# Altium PCB PCB1_DEC22.pcbdoc (part 2 of 2)
Units mil, origin at the board's own origin, x right, y up, seen from the top; angles counter-clockwise.
Board outline 3265 x 2215 mil, 2 copper layers (Top Layer, Bottom Layer); 80 components, 60 nets, 287 pads, 93 vias.
Unrouted connection lines stored in the file: 5.
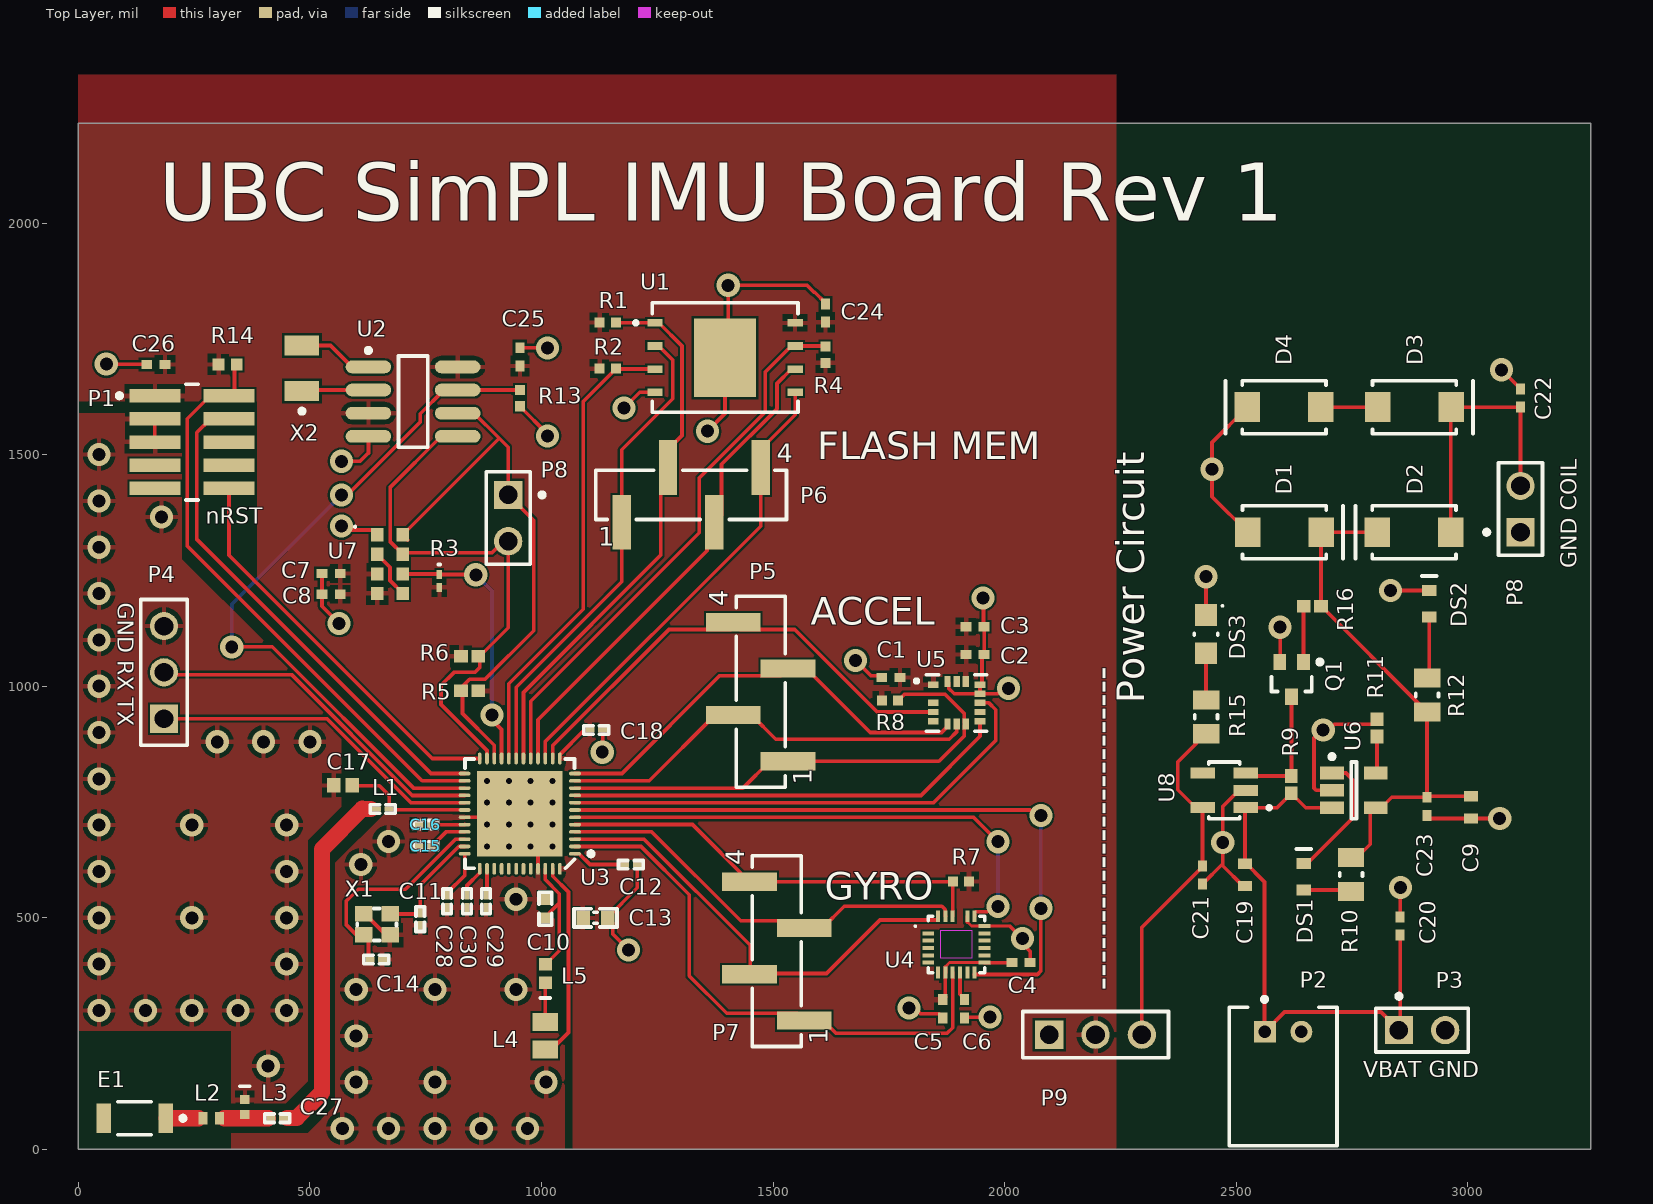
[diagram p0: Top Layer view]

## Via types
v1: diameter 50, hole 28, Top Layer to Bottom Layer, 77 vias
v2: diameter 25.98, hole 12.99, Top Layer to Bottom Layer, 16 vias

## Nets (pads, with @x,y where several pads share a name; then routed paths per layer and width w, separated by ;. In a path a pad name is that pad's centre, name@x,y a point inside that pad or via, vN(x,y) a via of type N, cw(c..) or ccw(c..) an arc to the next point about the centre after c; other vN are vias at no path point) (continued)
MEM_SPI_HOLD: (continued)
  Top Layer w8: U3.17 976.84,967.55 1340.77,1331.48 1340.77,1449.5 1483.22,1591.95 1483.22,1678.25 1539.49,1734.52 U1.7 R4.1@1613.22,1734.52
MEM_SPI_W: R2.1 U1.3 U3.20 | length 1030.2
  Top Layer w8: U3.20 929.6,1005.49 1090.02,1165.92 1090.02,1614.63 1160.93,1685.54 1161.45,1685.03 1236.73,1685.03 1244.49,1685.03 U1.3 U1.3@1236.73,1684.52
NetC6_1: C6.1 U4.10 | length 62.8
  Top Layer w8: 1903.59,335.13 U4.10@1903.59,381.78 ; 1903.69,335.13 1913.69,325.13 C6.1
NetC17_2: C17.2 L1.1 U3.30 | length 283.2
  Top Layer w8: C17.2@591.31,785 650.04,785 671.08,763.96 L1.1@671.08,734.85 ; L1.1@671.18,733.09 L1.1@672.94,733.09 ; L1.1 L1.1@672.94,733.09 ; U3.30@833.76,733.09 L1.1@672.94,733.09 ; U3.30@833.86,733.09 U3.30@834.22,732.73
NetC27_1: C27.1 L2.1 L3.2 | length 94.8
  Top Layer w8: L2.1 L2.1@305.06,67.24
  Top Layer w35: 315,67.24 C27.1@409.57,67.24
NetC29_2: C29.2 U3.38 | length 57.3
  Top Layer w8: C29.2 880.31,553.26 882.45,555.39 U3.38
NetC30_2: C30.2 U3.37 | length 67.8
  Top Layer w8: C30.2 839.22,569.64 U3.37@866.6,597.03 ; U3.37@866.7,597.03 U3.37@866.7,605.76
NetD3_1: D3.1 D4.1 | length 122.7
  Top Layer w8: D4.1 D3.1
NetDS1_1: DS1.1 R10.1 | length 103.2
  Top Layer w8: DS1.1 2744.94,559.88 R10.1
NetDS1_2: DS1.2 U6.1 | length 289.3
  Top Layer w8: DS1.2@2649.47,613.3 2751.32,715.15 2751.32,797.93 2736.82,812.43 2706.85,812.43 U6.1 U6.1@2718.54,812.54
NetDS2_1: DS2.1 R12.1 | length 134.3
  Top Layer w8: R12.1@2917.01,1017.44 DS2.1 DS2.1@2918.82,1151.04
NetDS3_2: DS3.2 R15.1 | length 100.8
  Top Layer w8: R15.1 DS3.2
NetE1_1: E1.1 L2.2 | length 69.1
  Top Layer w35: E1.1@190.42,67.09 259.57,67.09
NetL4_1: L4.1 U3.47 | length 426.9
  Top Layer w8: L4.1@1016.21,210.41 1058.22,252.41 1058.22,555.54 ; U3.47@1024.18,605.76 1024.18,589.68 1058.31,555.54
NetL4_2: L4.2 L5.1 | length 90.1
  Top Layer w8: L4.2@1008.34,269.85 L5.1
NetQ1_1: Q1.1 R16.1 | length 120.4
  Top Layer w8: Q1.1 2645.1,1171.72 R16.1
NetQ1_3: Q1.3 R9.1 U8.3 | length 272.6
  Top Layer w8: U8.3 2527.05,806.13 R9.1 2619.51,806.66 Q1.3
NetR11_2: R11.2 U6.5 | length 80
  Top Layer w8: U6.5 2803.97,815.3 R11.2
NetU2_1: U2.1 X2.2 | length 162.7
  Top Layer w8: X2.2 544.69,1735.58 590.84,1689.44 U2.1
NetU2_2: U2.2 X2.1 | length 144.5
  Top Layer w8: X2.1@482.82,1637.16 X2.1@485.1,1639.44 ; X2.1@485.01,1639.44 U2.2
nRESET: P1.10 U3.24 | length 867.4
  Top Layer w8: P1.10 325.48,1282.59 764.12,843.95 U3.24
P0.27: U3.39
P0.28/AIN4: U3.40
RF: C27.2 L1.2 | length 764.5
  Top Layer w35: C27.2@451,68 471.46,68 526.23,122.77 526.23,648.2 613.23,735.2 631.31,735
RST_CLK: R13.2 U2.7 U3.27 | length 1544
  Top Layer w8: v1(331.31,1085) 418.64,1085 723.67,779.97 U3.27 ; v1(568.22,1413.04) 580.72,1413.04 738.22,1570.54 738.22,1588.07 U2.7@789.58,1639.44 ; U2.7@789.68,1639.44 U2.7 R13.2@952.29,1639.44 ; R13.2@952.39,1639.44 R13.2@952.82,1639.87
  Bottom Layer w8: v1(331.31,1085) 331.31,1176.14 v1(568.22,1413.04)
RX: P4.2 U3.28 | length 757.1
  Top Layer w8: P4.2@185,1025 460.25,1025 721.03,764.22 U3.28
SWDCLK: P1.4 U3.25 | length 1100.5
  Top Layer w8: 255.48,1547.5 255.48,1317.59 761.6,811.47 U3.25 ; 255.58,1547.5 P1.4@285.22,1577.15 ; P1.4@285.13,1577.15 P1.4@285.22,1577.15 ; P1.4 P1.4@285.22,1577.15
SWDIO: P1.2 R14.1 U3.26 | length 1261.4
  Top Layer w8: P1.2@337.05,1638.72 P1.2 285.13,1627.15 235.48,1577.5 235.48,1302.59 742.35,795.72 U3.26 ; P1.2@337.15,1638.72 R14.1@337.15,1689.7
TX: P4.1 U3.29 | length 735.7
  Top Layer w8: P4.1@173.58,929.85 P4.1 537.02,929.85 718.39,748.48 U3.29
VBAT: C19.2 C20.1 P2.1 P3.1 R9.2 U6.3 U8.1 | length 1243.5
  Top Layer w8: R9.2 R9.2@2618.97,767.74 ; U6.3 2649.96,737.74 2630.74,756.96 2629.75,756.96 R9.2@2618.97,767.74 ; C20.1 2853.97,260.3 P3.1 2812.34,296.43 2604.27,296.43 P2.1 2561.22,254.63 2561.22,577.54 2518.97,619.79 2518.97,736.09 U8.1 2587.99,737.74 2607.21,756.96 2608.19,756.96 R9.2@2618.97,767.74
VBUS: C9.2 C23.1 D1.2 D2.2 R10.2 R12.2 R16.2 U6.4 | length 1150
  Top Layer w8: R10.2@2749.23,618.84 2789.41,659.02 2789.41,737.74 U6.4 2813.03,737.74 2835.59,760.3 C23.1 R12.2 ; D2.2 D1.2 2683.21,1332.33 R16.2 2684.19,1172.43 2894.84,961.78 R12.2 ; R12.2@2912.55,944.06 R12.2 ; C23.1@2914.13,762.43 C9.2
XC1: C14.2 U3.34 X1.1 | length 467.4
  Top Layer w8: C14.2@626.53,412.76 626.53,452.56 X1.1 600.8,462.96 578.22,485.54 578.22,535.54 604.22,561.54 706.22,561.54 814.41,669.74 ; C14.2@626.63,412.76 C14.2 ; 814.51,669.74 U3.34@834.22,669.74
XC2: C11.2 U3.35 X1.3 | length 256.3
  Top Layer w8: X1.3 C11.2@735.66,508.24 ; C11.2@735.75,508.24 C11.2 ; C11.2@738.22,510.8 738.22,570.6 U3.35@821.6,653.99 ; U3.35@821.7,653.99 U3.35@834.22,653.99
pads on no net: E1.2 P1.6 P1.7 P1.8 P1.9 U3.41 U3.42 U3.43 U3.44 U4.1 U4.2 U4.3 U4.4 U4.5 U4.6 U4.7 U4.11 U4.14 U4.15 U4.16 U4.17 U4.21 U5.2 U5.3 U5.5 U5.10 U5.15 U8.4
copper on no net:
  other v2: 882.35,653.99 929.6,653.99 976.84,653.99 1024.08,653.99 882.35,701.23 929.6,701.23 976.84,701.23 1024.08,701.23 882.35,748.48 929.6,748.48 976.84,748.48 1024.08,748.48 882.35,795.72 929.6,795.72 976.84,795.72 1024.08,795.72

## Polygon pours and split planes (outlines as drawn)
GND on Top Layer "Top Layer-GND 1" (solid, pour order 24): 0,255.91 330,255.91 330,100 447.73,100 495,147.27 495,666.98 568,739.98 568,929.91 223.86,1274.05 223.86,1589.44 0,1589.44
+3V3 on Top Layer "Top Layer-+3V3" (solid, remove dead copper, pour order 18): 1067.22,0 2241.22,0 2241.22,2320 0,2320 0,1615 386.31,1615 386.31,1222.45 1067.22,541.54
GND on Top Layer "Top Layer-GND" (solid, remove dead copper, pour order 26): 330,35 330,0 1050,0 1050,670 986.91,733.09 669.22,733.09 555,618.87 555,95 495,35
GND on Bottom Layer "Bottom Layer-GND" (solid, remove dead copper, pour order 22): 0,0 3315,0 3315,2360 0,2360

## Silkscreen, mask and mechanical layers (free items; w line width, h text height)
Top Overlay:
  text "UBC SimPL IMU Board Rev 1" at 175,2005 h125
  text "FLASH MEM" at 1595,1490 h60
  text "nRST" at 275.48,1350.54 h35
  text "GND COIL" at 3235,1255 h35 r90
  text "GND RX TX" at 85,1180 h35 r270
  text "ACCEL" at 1581.22,1132.54 h60
  text "Power Circuit" at 2301.22,963.54 h60 r90
  text "GYRO" at 1611.22,539.22 h60
  text "------------------------" at 2237.22,342.54 h60 r90
  text "VBAT GND" at 2773.82,155.43 h35

## Text inside footprints (layer, text, board x,y; h text height)
P5: Top Overlay "4" at 1402.35,1173.08 h40 r90; Top Overlay "1" at 1583.45,787.26 h40 r90
P6: Top Overlay "4" at 1508.26,1483.91 h40; Top Overlay "1" at 1122.43,1302.81 h40
P7: Top Overlay "1" at 1618.45,227.26 h40 r90; Top Overlay "4" at 1437.35,613.08 h40 r90